# EAGLE board chromatic_drum_gate_sync (EAGLE 8.0.0)
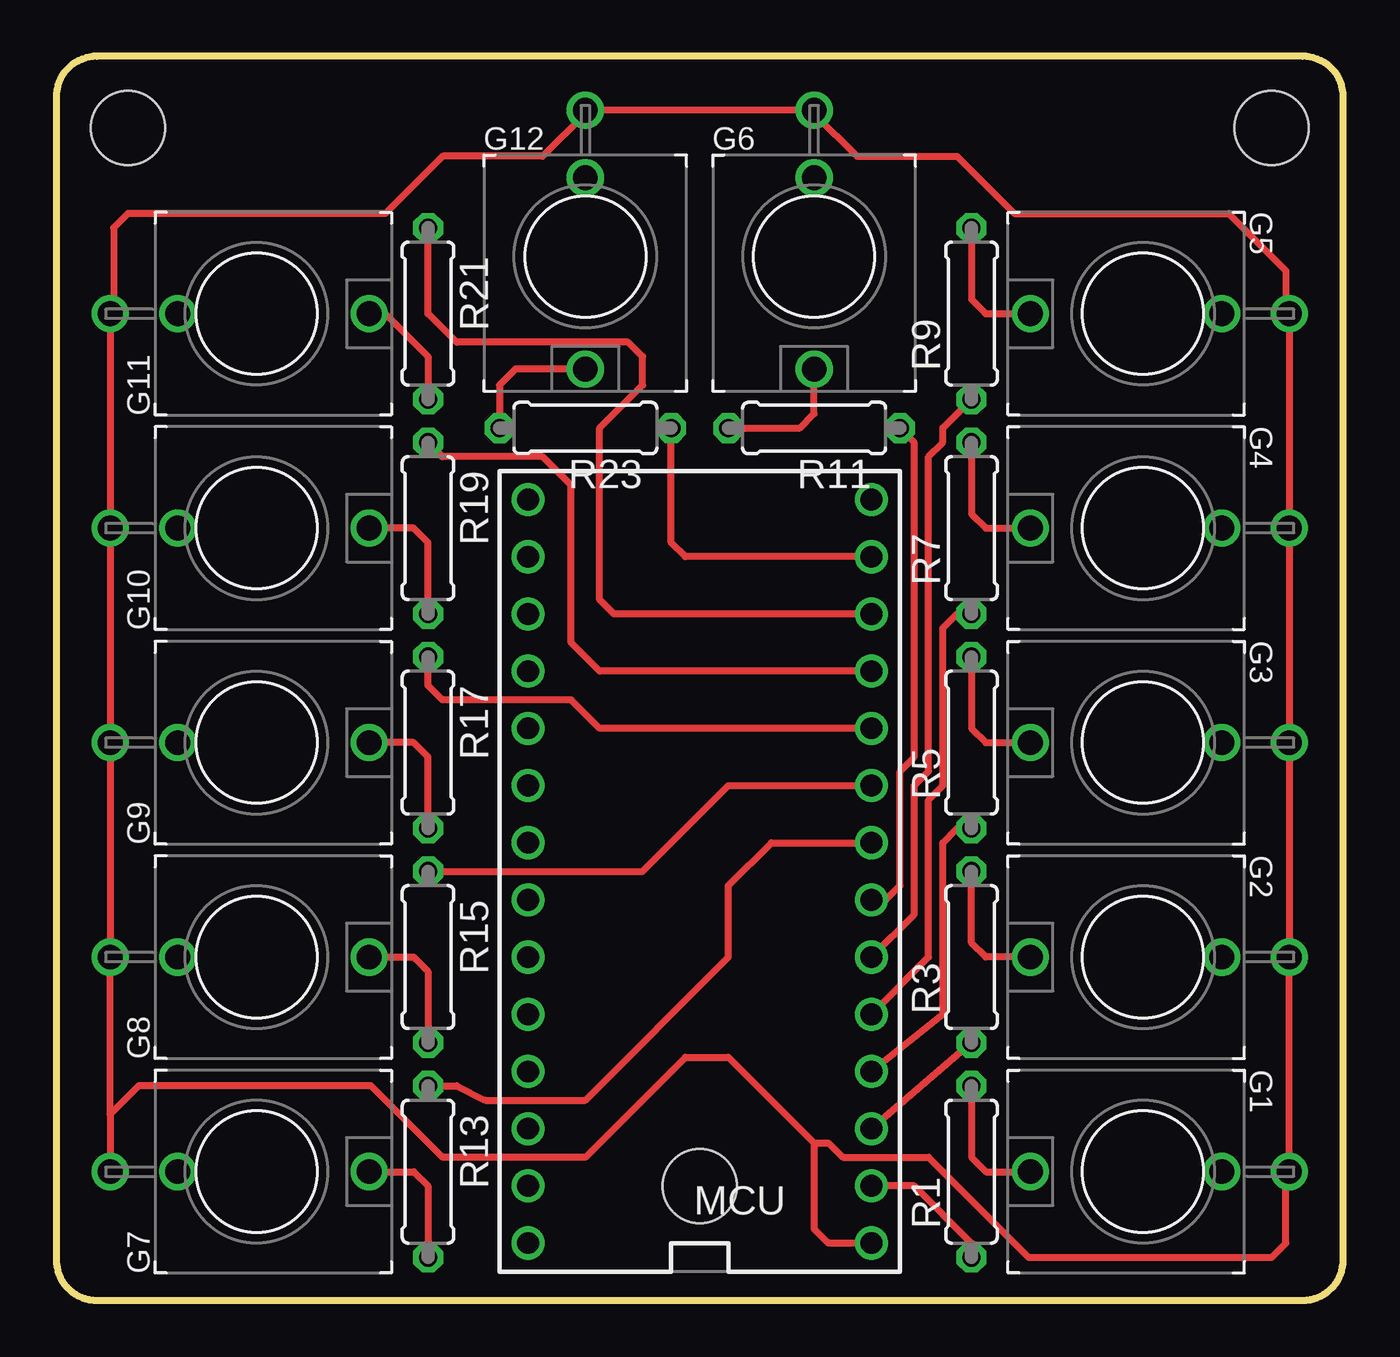
[diagram p0: board, top side]

Size 57.15 x 55.25 mm. Coordinates in mm from the lower left corner, seen from the top.
Outline: 0,53.45 0,1.8 arc90 1.8,0 55.35,0 arc90 57.15,1.8 57.15,53.45 arc90 55.35,55.25 1.8,55.25 arc90 0,53.45
Copper layers (1*16): Top 0.035mm / dielectric 1.5mm / Bottom 0.035mm
Design rules "default": minimum track width 10mil, minimum drill 24mil, track to track 8mil, track to pad 8mil, pad to pad 8mil, via to via 8mil, smd to smd 8mil, copper to edge 40mil, drill to drill 8mil, minimum pad ring 10mil, minimum via ring 8mil, stop-mask expansion 4mil, vias tented up to drill 0mil, thermal gap 10mil
Holes 3.3 mm at 28.57,5.08 3.18,52.07 53.97,52.07

## Footprints (pad centres in the part's own frame; a part is rotated, then mirrored left to right if it is on the bottom)
WQP-PJ301M-12_JACK = drill 1.1: P$1_TIP 0,5; P$2_SWITCH 0,-3.5; P$3_SLEEVE 0,-6.5
TEENSY_3.0-3.2&LC_DIL = drill 0.965: 0 -7.62,13.97; 1 -7.62,11.43; 2 -7.62,8.89; 3 -7.62,6.35; 3.3V 7.62,11.43; 4 -7.62,3.81; 5 -7.62,1.27; 6 -7.62,-1.27; 7 -7.62,-3.81; 8 -7.62,-6.35; 9 -7.62,-8.89; 10 -7.62,-11.43; 11 -7.62,-13.97; 12 -7.62,-16.51; 13 7.62,-16.51; 14/A0 7.62,-13.97; 15/A1 7.62,-11.43; 16/A2 7.62,-8.89; 17/A3 7.62,-6.35; 18/A4 7.62,-3.81; 19/A5 7.62,-1.27; 20/A6 7.62,1.27; 21/A7 7.62,3.81; 22/A8 7.62,6.35; 23/A9 7.62,8.89; AGND 7.62,13.97; GND -7.62,16.51; VIN 7.62,16.51
0207/7 = drill 0.813 octagon: 1 -3.81,0; 2 3.81,0

## Placement (x,y rotation side)
G1  THONKICONNNEW  [WQP-PJ301M-12_JACK]  48.26,5.71 90 top
G2  THONKICONNNEW  [WQP-PJ301M-12_JACK]  48.26,15.24 90 top
G3  THONKICONNNEW  [WQP-PJ301M-12_JACK]  48.26,24.77 90 top
G4  THONKICONNNEW  [WQP-PJ301M-12_JACK]  48.26,34.29 90 top
G5  THONKICONNNEW  [WQP-PJ301M-12_JACK]  48.26,43.82 90 top
G6  THONKICONNNEW  [WQP-PJ301M-12_JACK]  33.66,46.36 180 top
G7  THONKICONNNEW  [WQP-PJ301M-12_JACK]  8.89,5.71 270 top
G8  THONKICONNNEW  [WQP-PJ301M-12_JACK]  8.89,15.24 270 top
G9  THONKICONNNEW  [WQP-PJ301M-12_JACK]  8.89,24.77 270 top
G10  THONKICONNNEW  [WQP-PJ301M-12_JACK]  8.89,34.29 270 top
G11  THONKICONNNEW  [WQP-PJ301M-12_JACK]  8.89,43.82 270 top
G12  THONKICONNNEW  [WQP-PJ301M-12_JACK]  23.5,46.36 180 top
MCU  TEENSY_3.1-3.2_DIL  [TEENSY_3.0-3.2&LC_DIL]  28.57,19.05 180 top
R1  1k  [0207/7]  40.64,5.71 90 top
R3  1k  [0207/7]  40.64,15.24 90 top
R5  1k  [0207/7]  40.64,24.77 90 top
R7  1k  [0207/7]  40.64,34.29 90 top
R9  1k  [0207/7]  40.64,43.82 90 top
R11  1k  [0207/7]  33.66,38.73 180 top
R13  1k  [0207/7]  16.51,5.71 270 top
R15  1k  [0207/7]  16.51,15.24 270 top
R17  1k  [0207/7]  16.51,24.77 270 top
R19  1k  [0207/7]  16.51,34.29 270 top
R21  1k  [0207/7]  16.51,43.82 270 top
R23  1k  [0207/7]  23.5,38.73 180 top

## Library data of the parts
G1-G12 = MusicThingModular
MCU = Teensy_3_and_LC_Series_Boards_v1.4
R1 R3 R5 R7 R9 R11 R13 R15 R17 R19 R21 R23 = rcl

## Nets
3.3V: MCU.3.3V
AGND: MCU.AGND
GND: G1.P$3_SLEEVE G2.P$3_SLEEVE G3.P$3_SLEEVE G4.P$3_SLEEVE G5.P$3_SLEEVE G6.P$3_SLEEVE G7.P$3_SLEEVE G8.P$3_SLEEVE G9.P$3_SLEEVE G10.P$3_SLEEVE G11.P$3_SLEEVE G12.P$3_SLEEVE MCU.GND
N$1: G1.P$1_TIP R1.2
N$2: G2.P$1_TIP R3.2
N$3: MCU.1 R3.1
N$4: MCU.0 R1.1
N$7: G3.P$1_TIP R5.2
N$8: MCU.2 R5.1
N$10: G4.P$1_TIP R7.2
N$11: MCU.3 R7.1
N$13: G5.P$1_TIP R9.2
N$14: MCU.4 R9.1
N$16: G6.P$1_TIP R11.2
N$17: MCU.5 R11.1
N$19: G7.P$1_TIP R13.2
N$20: MCU.6 R13.1
N$22: G8.P$1_TIP R15.2
N$23: MCU.7 R15.1
N$25: G9.P$1_TIP R17.2
N$26: MCU.8 R17.1
N$28: G10.P$1_TIP R19.2
N$29: MCU.9 R19.1
N$31: G11.P$1_TIP R21.2
N$32: MCU.10 R21.1
N$34: G12.P$1_TIP R23.2
N$35: MCU.11 R23.1
VIN: MCU.VIN

## Tracks (layer width: path | path; a pad name or v marks a point on that pad's centre or on a via)
GND
  Top 0.305: 2.39,8.26 G8.P$3_SLEEVE G9.P$3_SLEEVE G10.P$3_SLEEVE G11.P$3_SLEEVE 2.54,43.97 2.54,47.62 3.18,48.26 14.6,48.26 17.14,50.8 21.59,50.8 23.5,52.7 G12.P$3_SLEEVE G6.P$3_SLEEVE 33.66,52.7 35.56,50.8 40,50.8 42.54,48.26 52.07,48.26 54.61,45.72 54.61,43.97 G5.P$3_SLEEVE G4.P$3_SLEEVE G3.P$3_SLEEVE G2.P$3_SLEEVE G1.P$3_SLEEVE 54.61,5.56 54.61,2.54 53.97,1.91 43.18,1.91 38.73,6.35 34.92,6.35 34.29,6.98 33.66,6.98 | 2.39,8.26 G7.P$3_SLEEVE | MCU.GND 34.29,2.54 33.66,3.18 33.66,6.98 | 33.66,6.98 33.02,7.62 29.85,10.79 27.94,10.79 23.5,6.35 17.14,6.35 13.97,9.53 3.66,9.53 2.39,8.26
N$1
  Top 0.305: R1.2 40.64,6.35 41.27,5.71 G1.P$1_TIP
N$2
  Top 0.305: G2.P$1_TIP 41.27,15.24 40.64,15.87 R3.2
N$3
  Top 0.305: MCU.1 R3.1
N$4
  Top 0.305: R1.1 40.64,2.54 38.1,5.08 MCU.0
N$7
  Top 0.305: R5.2 40.64,25.4 41.27,24.77 G3.P$1_TIP
N$8
  Top 0.305: MCU.2 39.37,12.7 39.37,20.32 40,20.95 R5.1
N$10
  Top 0.305: R7.2 40.64,34.93 41.27,34.29 G4.P$1_TIP
N$11
  Top 0.305: MCU.3 38.73,15.24 38.73,22.23 39.37,22.86 39.37,29.84 40,30.48 R7.1
N$13
  Top 0.305: R9.2 40.64,44.45 41.27,43.82 G5.P$1_TIP
N$14
  Top 0.305: MCU.4 38.1,17.15 38.1,22.86 38.73,23.49 38.73,37.47 39.37,38.1 39.37,38.73 R9.1
N$16
  Top 0.305: R11.2 33.02,38.73 33.66,39.37 G6.P$1_TIP
N$17
  Top 0.305: MCU.5 36.83,17.78 37.46,18.41 37.46,23.49 38.1,24.13 38.1,38.1 R11.1
N$19
  Top 0.305: G7.P$1_TIP 15.87,5.71 16.51,5.08 R13.2
N$20
  Top 0.305: R13.1 17.78,9.53 19.05,8.89 23.5,8.89 29.85,15.24 29.85,18.41 31.75,20.32 MCU.6
N$22
  Top 0.305: G8.P$1_TIP 15.87,15.24 16.51,14.6 R15.2
N$23
  Top 0.305: R15.1 26.04,19.05 29.85,22.86 MCU.7
N$25
  Top 0.305: R17.2 16.51,24.13 15.87,24.77 G9.P$1_TIP
N$26
  Top 0.305: MCU.8 24.13,25.4 22.86,26.67 17.14,26.67 16.51,27.3 R17.1
N$28
  Top 0.305: R19.2 16.51,33.66 15.87,34.29 G10.P$1_TIP
N$29
  Top 0.305: MCU.9 24.13,27.94 22.86,29.21 22.86,36.2 21.59,37.47 17.14,37.47 R19.1
N$31
  Top 0.305: G11.P$1_TIP 14.6,43.82 16.51,41.91 R21.2
N$32
  Top 0.305: MCU.10 24.77,30.48 24.13,31.12 24.13,38.73 26.04,40.64 26.04,41.91 25.4,42.55 17.78,42.55 16.51,43.82 R21.1
N$34
  Top 0.305: G12.P$1_TIP 20.4,41.36 19.69,40.64 R23.2
N$35
  Top 0.305: MCU.11 27.94,33.02 27.3,33.66 R23.1